# Altium PCB SteeringWheel.PcbDoc
Units mm, origin at the board's own origin, x right, y up, seen from the top; angles counter-clockwise.
Board outline 152.4 x 101.6 mm, 2 copper layers (F.Cu, B.Cu); 6 components, 56 nets, 68 pads, 0 vias.
Unrouted connection lines stored in the file: 12.
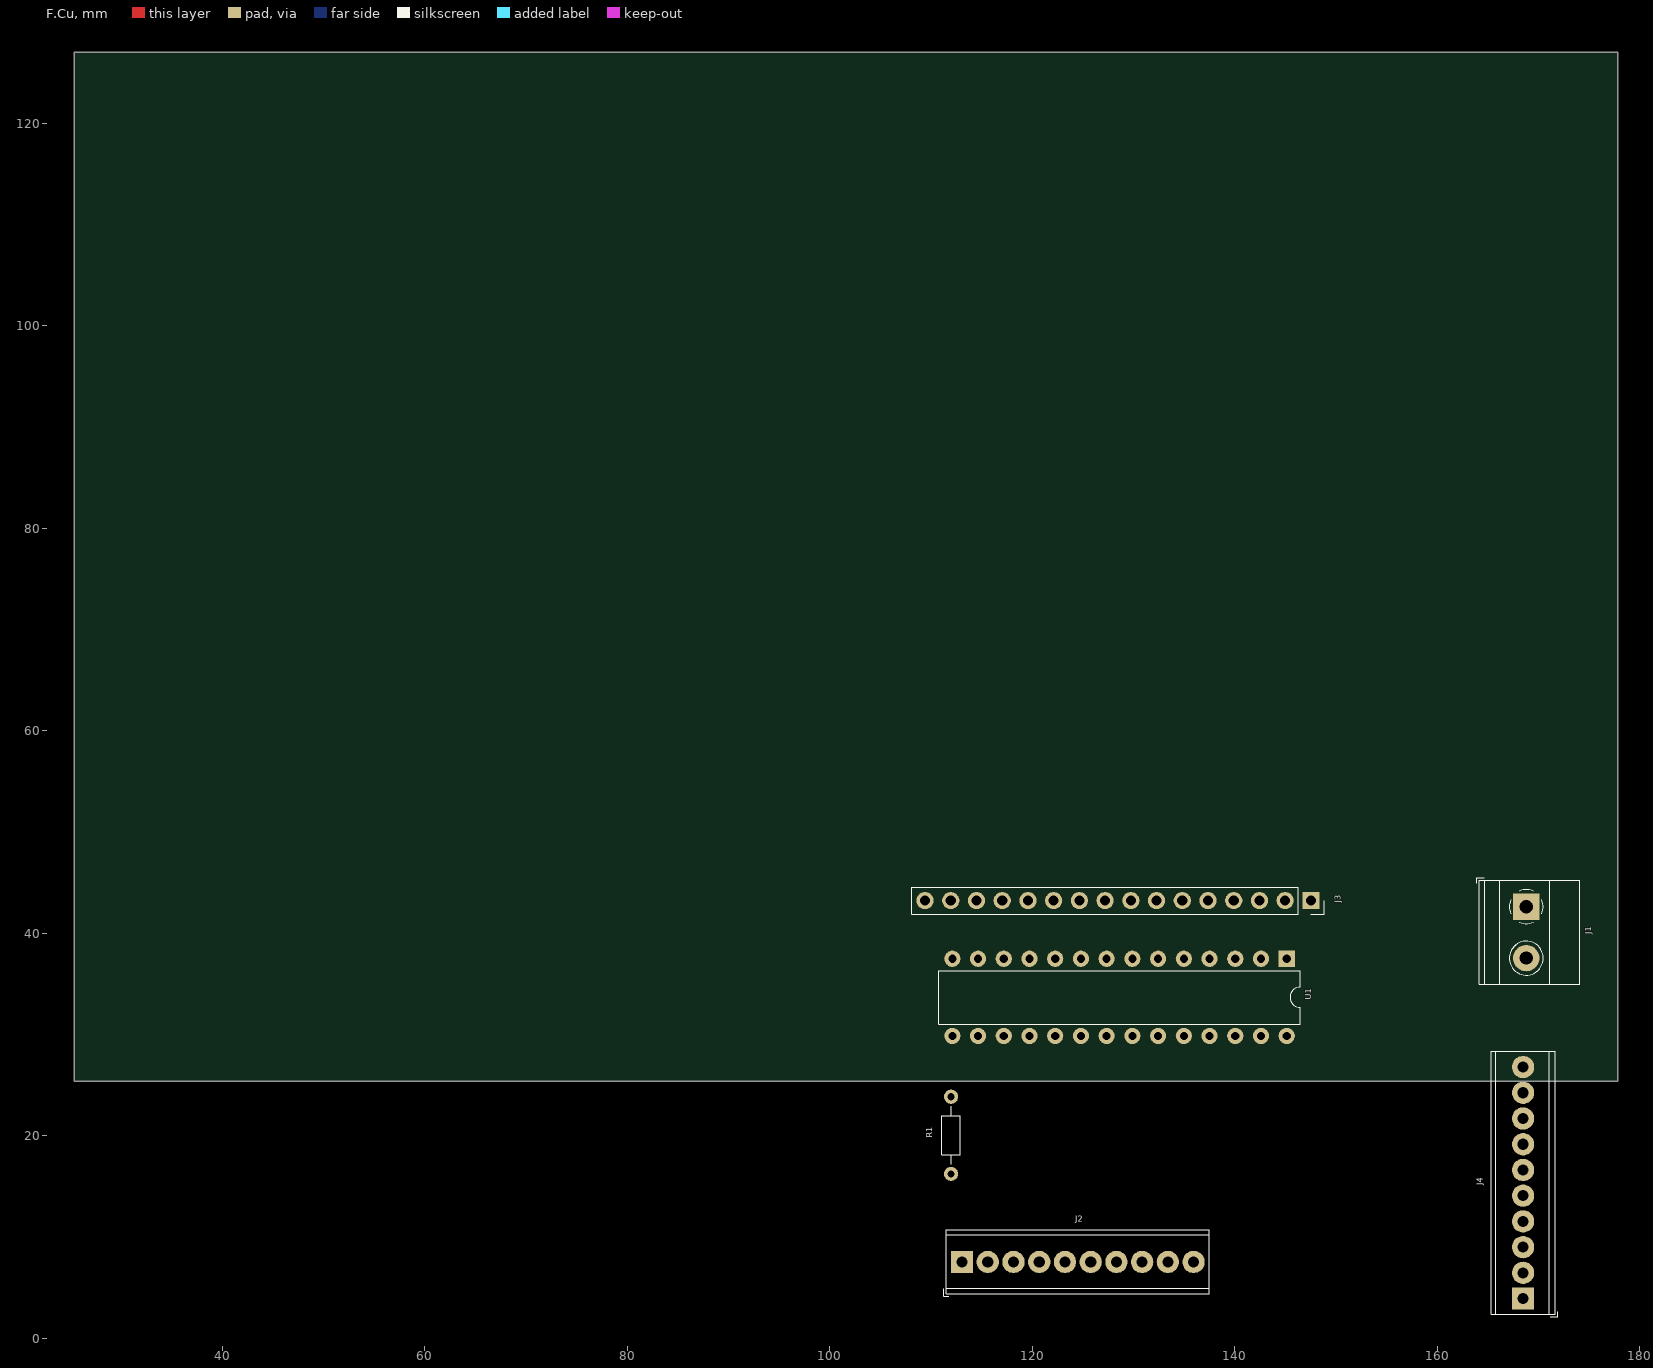
[diagram p0: F.Cu view]
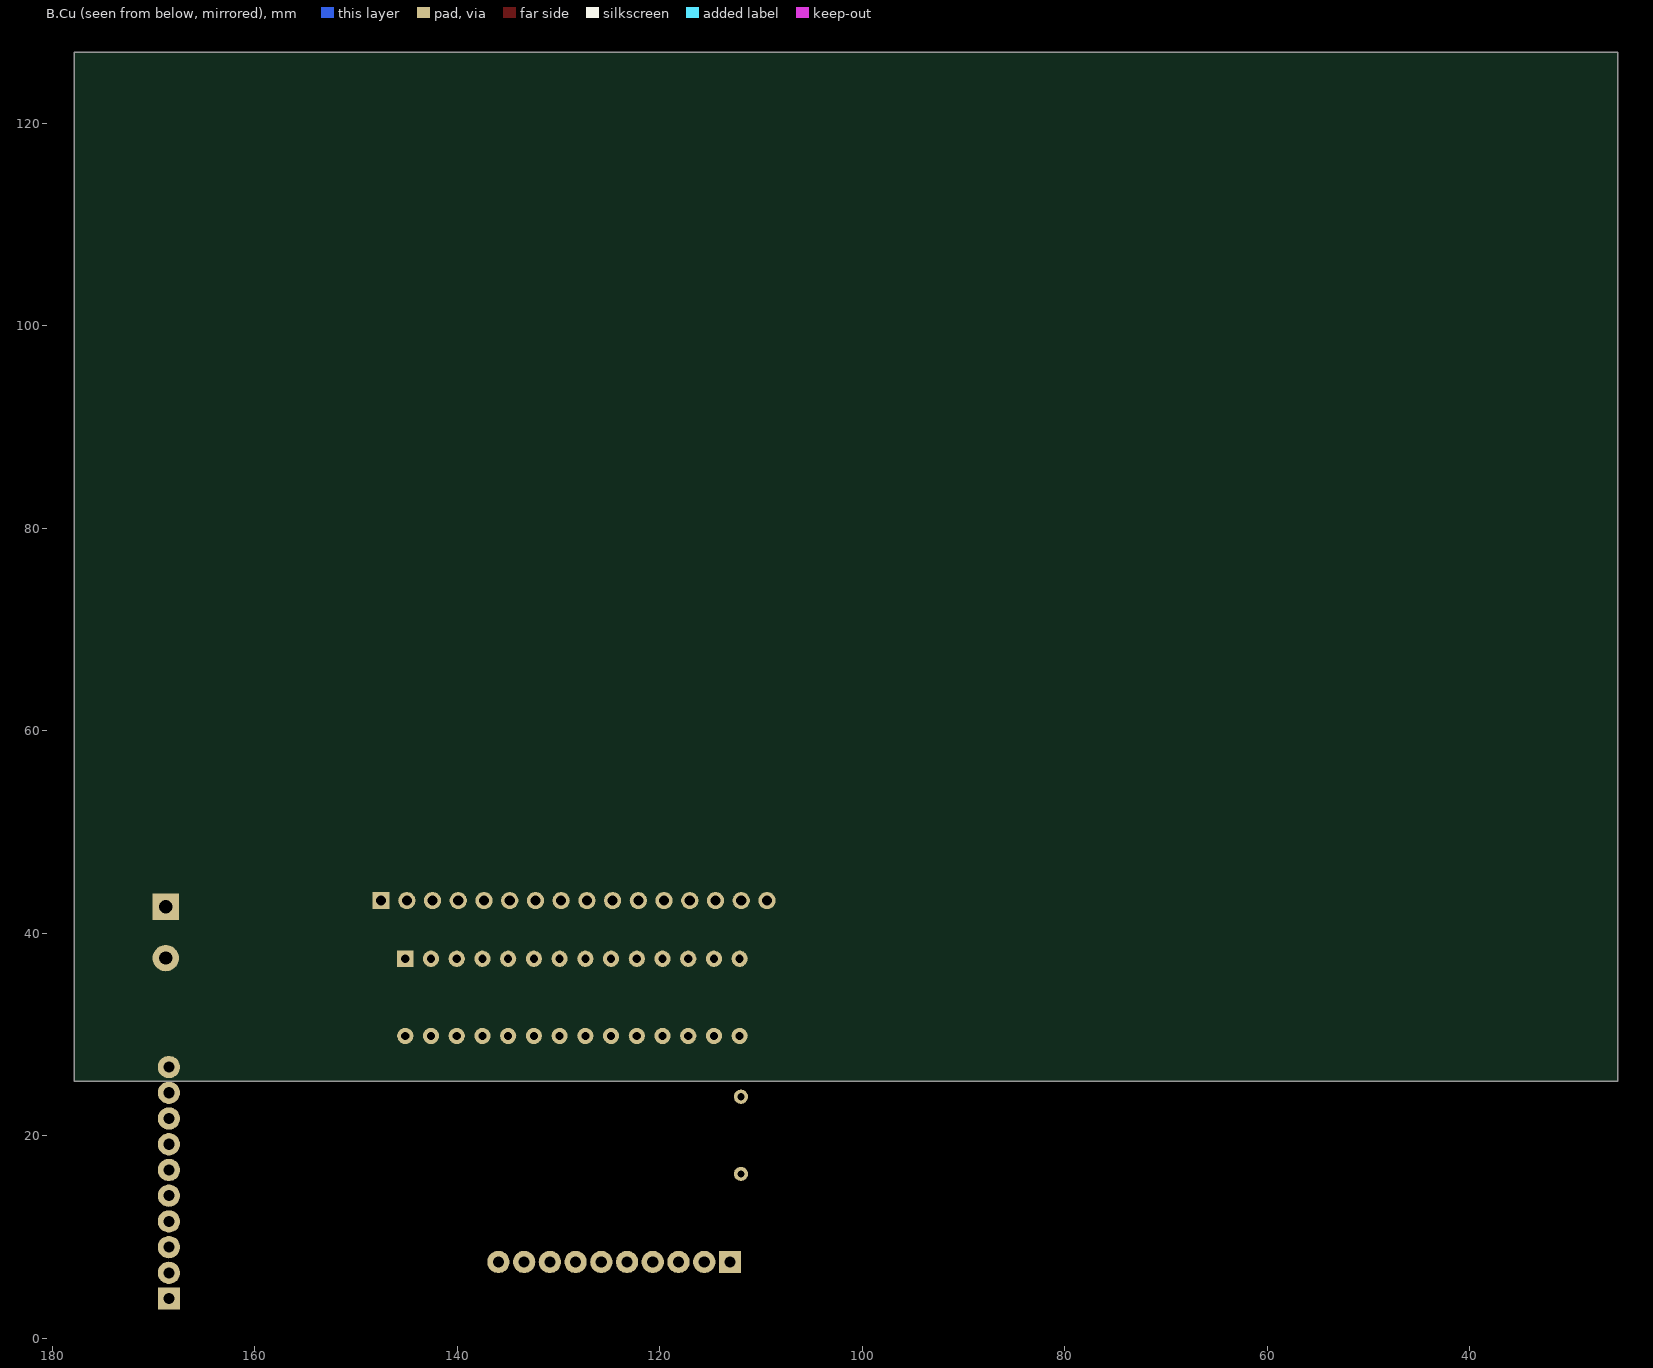
[diagram p1: B.Cu view, seen from below]

## Layer stack, top to bottom
F.Mask: solder mask 0.0102, Solder Resist, Dk 3.5
F.Cu: signal copper 0.0356
Dielectric 1: dielectric 0.32, FR-4, Dk 4.8
B.Cu: signal copper 0.0356
B.Mask: solder mask 0.0102, Solder Resist, Dk 3.5

## Board outline
25.4,25.4 177.8,25.4 177.8,127 25.4,127

## Design rules (kind name [scope] priority, off if disabled: settings)
Clearance "Clearence 0.2_NetClass" [InNetClass('Default')] p1: gap=0.2 ignorepadtopadclearanceinfootprint=FALSE
HoleSize "Hole Size (Default)" [All] p1: absolutevalues=TRUE maxlimit=10 minlimit=0.3 maxpercent=80.000 minpercent=20.000
MinimumSolderMaskSliver [All] p1: minsoldermaskwidth=0
PolygonConnect [All] p1: connectstyle=Direct reliefconductorwidth=0.254 reliefentries=4 polygonreliefangle="90 Angle" airgapwidth=0.254
RoutingVias [All] p1: holewidth=0.711 width=1.27 viastyle="Through Hole" minholewidth=0.711 minwidth=1.27 maxholewidth=0.711 maxwidth=1.27
SilkToSilkClearance [All] p1: silktosilkclearance=0
SilkToSolderMaskClearance [IsPad] p1: minsilkscreentomaskgap=0 clearancetoexposedcopper=TRUE
SolderMaskExpansion [All] p1: expansion=0.102 istentingtop=FALSE
Width [All] p1: maxlimit=0.254 minlimit=0.254 preferedwidth=0.254
26 further rules are at their usual default settings.

## Classes and differential pairs
net class Default: +5V GND Net-(J2-Pad1) Net-(J2-Pad2) Net-(J2-Pad3) Net-(J2-Pad4) Net-(J2-Pad5) Net-(J2-Pad6) Net-(J2-Pad7) Net-(J2-Pad8) Net-(J2-Pad9) Net-(J2-Pad10) Net-(J3-Pad1) Net-(J3-Pad3) Net-(J3-Pad4) Net-(J3-Pad5) Net-(J3-Pad6) Net-(J3-Pad7) Net-(J3-Pad8) Net-(J3-Pad9) Net-(J3-Pad10) Net-(J3-Pad11) Net-(J3-Pad12) Net-(J3-Pad13) Net-(J3-Pad14) Net-(J3-Pad15) Net-(J3-Pad16) Net-(J4-Pad2) Net-(J4-Pad3) Net-(J4-Pad4) Net-(J4-Pad5) Net-(J4-Pad7) Net-(R1-Pad2) Net-(U1-Pad1) Net-(U1-Pad6) Net-(U1-Pad7) Net-(U1-Pad8) Net-(U1-Pad9) Net-(U1-Pad10) Net-(U1-Pad11) Net-(U1-Pad12) Net-(U1-Pad13) Net-(U1-Pad14) Net-(U1-Pad16) Net-(U1-Pad17) Net-(U1-Pad18) Net-(U1-Pad19) Net-(U1-Pad20) Net-(U1-Pad21) Net-(U1-Pad22) Net-(U1-Pad23) Net-(U1-Pad24) Net-(U1-Pad25) Net-(U1-Pad26) Net-(U1-Pad27) Net-(U1-Pad28)

## Components (designator, comment, footprint, x,y, rotation, side; value= is the part's Value field where it differs from the comment)
J1 "Conn_01x02_Male" TerminalBlock_Phoenix_MKDS-1,5-2-5.08_1x02_P5.08mm_Horizontal 168.768,42.634 r270 top
J2 "Conn_01x10" TerminalBlock_Phoenix_MPT-0,5-10-2.54_1x10_P2.54mm_Horizontal 113.06,7.554 r0 top
J3 "Conn_01x16_Female" PinSocket_1x16_P2.54mm_Vertical 147.505,43.236 r270 top
J4 "Conn_01x10_Female" TerminalBlock_Phoenix_MPT-0,5-10-2.54_1x10_P2.54mm_Horizontal 168.458,3.94 r90 top
R1 "R" R_Axial_DIN0204_L3.6mm_D1.6mm_P7.62mm_Horizontal 111.976,16.251 r90 top
U1 "ATmega8A-PU" DIP-28_W7.62mm 145.118,37.493 r270 top

## Footprints (in the part's own frame and the unit in brackets; to place one, negate y for a bottom-side part, rotate by r counter-clockwise, add the part's x,y. Pads: shape width x height; smd on the part's side, far side on the other; paste and mask are expansions set on the pad)
DIP-28_W7.62mm [mm]
  rect 1.6x1.6 hole 0.8 paste-1.6 mask+0: 1(0,0)
  rrect100% 1.6x1.6 hole 0.8 paste-1.6 mask+0: 2(0,-2.54) 3(0,-5.08) 4(0,-7.62) 5(0,-10.16) 6(0,-12.7) 7(0,-15.24) 8(0,-17.78) 9(0,-20.32) 10(0,-22.86) 11(0,-25.4) 12(0,-27.94) 13(0,-30.48) 14(0,-33.02) 15(7.62,-33.02) 16(7.62,-30.48) 17(7.62,-27.94) 18(7.62,-25.4) 19(7.62,-22.86) 20(7.62,-20.32) 21(7.62,-17.78) 22(7.62,-15.24) 23(7.62,-12.7) 24(7.62,-10.16) 25(7.62,-7.62) 26(7.62,-5.08) 27(7.62,-2.54) 28(7.62,0)
  silkscreen extent 1.16,-34.35 6.46,1.33
PinSocket_1x16_P2.54mm_Vertical [mm]
  rect 1.7x1.7 hole 1 paste-1.7 mask+0: 1(0,0)
  rrect100% 1.7x1.7 hole 1 paste-1.7 mask+0: 2(0,-2.54) 3(0,-5.08) 4(0,-7.62) 5(0,-10.16) 6(0,-12.7) 7(0,-15.24) 8(0,-17.78) 9(0,-20.32) 10(0,-22.86) 11(0,-25.4) 12(0,-27.94) 13(0,-30.48) 14(0,-33.02) 15(0,-35.56) 16(0,-38.1)
  silkscreen extent -1.33,-39.43 1.33,1.33
R_Axial_DIN0204_L3.6mm_D1.6mm_P7.62mm_Horizontal [mm]
  round 1.4 hole 0.7 paste-1.4 mask+0: 1(0,0)
  rrect100% 1.4x1.4 hole 0.7 paste-1.4 mask+0: 2(7.62,0)
  silkscreen extent 0.94,-0.92 6.68,0.92
TerminalBlock_Phoenix_MKDS-1,5-2-5.08_1x02_P5.08mm_Horizontal [mm]
  rect 2.6x2.6 hole 1.3 paste-2.6 mask+0: 1(0,0)
  round 2.6 hole 1.3 paste-2.6 mask+0: 2(5.08,0)
  silkscreen extent -2.84,-4.9 7.68,5.26
TerminalBlock_Phoenix_MPT-0,5-10-2.54_1x10_P2.54mm_Horizontal [mm]
  rect 2.2x2.2 hole 1.1 paste-2.2 mask+0: 1(0,0)
  round 2.2 hole 1.1 paste-2.2 mask+0: 2(2.54,0) 3(5.08,0) 4(7.62,0) 5(10.16,0) 6(12.7,0) 7(15.24,0) 8(17.78,0) 9(20.32,0) 10(22.86,0)
  silkscreen extent -1.8,-3.4 24.42,3.16

## Part data
J1: library part TerminalBlock_Phoenix_MKDS-1,5-2-5.08_1x02_P5.08mm_Horizontal, "Terminal Block Phoenix MKDS-1,5-2-5.08, 2 pins, pitch 5.08mm, size 10.2x9.8mm^2, drill diamater 1.3mm, pad diameter 2.6mm, see http://www.farnell.com/datasheets/100425.pdf, script-generated using https://github.com/pointhi/kicad-footprint-generator/scripts/TerminalBlock_Phoenix"
J2 J4: library part TerminalBlock_Phoenix_MPT-0,5-10-2.54_1x10_P2.54mm_Horizontal, "Terminal Block Phoenix MPT-0,5-10-2.54, 10 pins, pitch 2.54mm, size 25.9x6.2mm^2, drill diamater 1.1mm, pad diameter 2.2mm, see http://www.mouser.com/ds/2/324/ItemDetail_1725672-916605.pdf, script-generated using https://github.com/pointhi/kicad-footprint-generator/scripts/TerminalBlock_Phoenix"
J3: library part PinSocket_1x16_P2.54mm_Vertical, "Through hole straight socket strip, 1x16, 2.54mm pitch, single row (from Kicad 4.0.7), script generated"
R1: library part R_Axial_DIN0204_L3.6mm_D1.6mm_P7.62mm_Horizontal, "Resistor, Axial_DIN0204 series, Axial, Horizontal, pin pitch=7.62mm, 0.167W, length*diameter=3.6*1.6mm^2, http://cdn-reichelt.de/documents/datenblatt/B400/1_4W%23YAG.pdf"
U1: library part DIP-28_W7.62mm, "28-lead though-hole mounted DIP package, row spacing 7.62 mm (300 mils)"

## Nets (pads, with @x,y where several pads share a name; then routed paths per layer and width w, separated by ;. In a path a pad name is that pad's centre, name@x,y a point inside that pad or via, vN(x,y) a via of type N, cw(c..) or ccw(c..) an arc to the next point about the centre after c; other vN are vias at no path point)
+5V: J1.1 J3.2
GND: J1.2
Net-(J2-Pad1): J2.1 R1.1
Net-(J2-Pad2): J2.2 J4.10
Net-(J2-Pad3): J2.3 J4.9
Net-(J2-Pad4): J2.4 J4.8
Net-(J2-Pad5): J2.5
Net-(J2-Pad6): J2.6 J4.6
Net-(J2-Pad7): J2.7
Net-(J2-Pad8): J2.8
Net-(J2-Pad9): J2.9
Net-(J2-Pad10): J2.10 J4.1
Net-(J3-Pad1): J3.1
Net-(J3-Pad3): J3.3 U1.2
Net-(J3-Pad4): J3.4 U1.3
Net-(J3-Pad5): J3.5 U1.4
Net-(J3-Pad6): J3.6 U1.5
Net-(J3-Pad7): J3.7
Net-(J3-Pad8): J3.8
Net-(J3-Pad9): J3.9
Net-(J3-Pad10): J3.10
Net-(J3-Pad11): J3.11
Net-(J3-Pad12): J3.12
Net-(J3-Pad13): J3.13
Net-(J3-Pad14): J3.14
Net-(J3-Pad15): J3.15
Net-(J3-Pad16): J3.16
Net-(J4-Pad2): J4.2
Net-(J4-Pad3): J4.3
Net-(J4-Pad4): J4.4
Net-(J4-Pad5): J4.5
Net-(J4-Pad7): J4.7
Net-(R1-Pad2): R1.2 U1.15
Net-(U1-Pad1): U1.1
Net-(U1-Pad6): U1.6
Net-(U1-Pad7): U1.7
Net-(U1-Pad8): U1.8
Net-(U1-Pad9): U1.9
Net-(U1-Pad10): U1.10
Net-(U1-Pad11): U1.11
Net-(U1-Pad12): U1.12
Net-(U1-Pad13): U1.13
Net-(U1-Pad14): U1.14
Net-(U1-Pad16): U1.16
Net-(U1-Pad17): U1.17
Net-(U1-Pad18): U1.18
Net-(U1-Pad19): U1.19
Net-(U1-Pad20): U1.20
Net-(U1-Pad21): U1.21
Net-(U1-Pad22): U1.22
Net-(U1-Pad23): U1.23
Net-(U1-Pad24): U1.24
Net-(U1-Pad25): U1.25
Net-(U1-Pad26): U1.26
Net-(U1-Pad27): U1.27
Net-(U1-Pad28): U1.28

## Silkscreen, mask and mechanical layers (free items; w line width, h text height)
Dwgs.User:
  lines w0.15: 103.393,47.876 177.297,47.818 ; 103.406,47.92 103.579,0.246 ; 103.584,0.244 177.315,0.066 ; 177.333,47.843 177.381,0